# EAGLE board LC_metr_BF245+pnp (EAGLE 6.0)
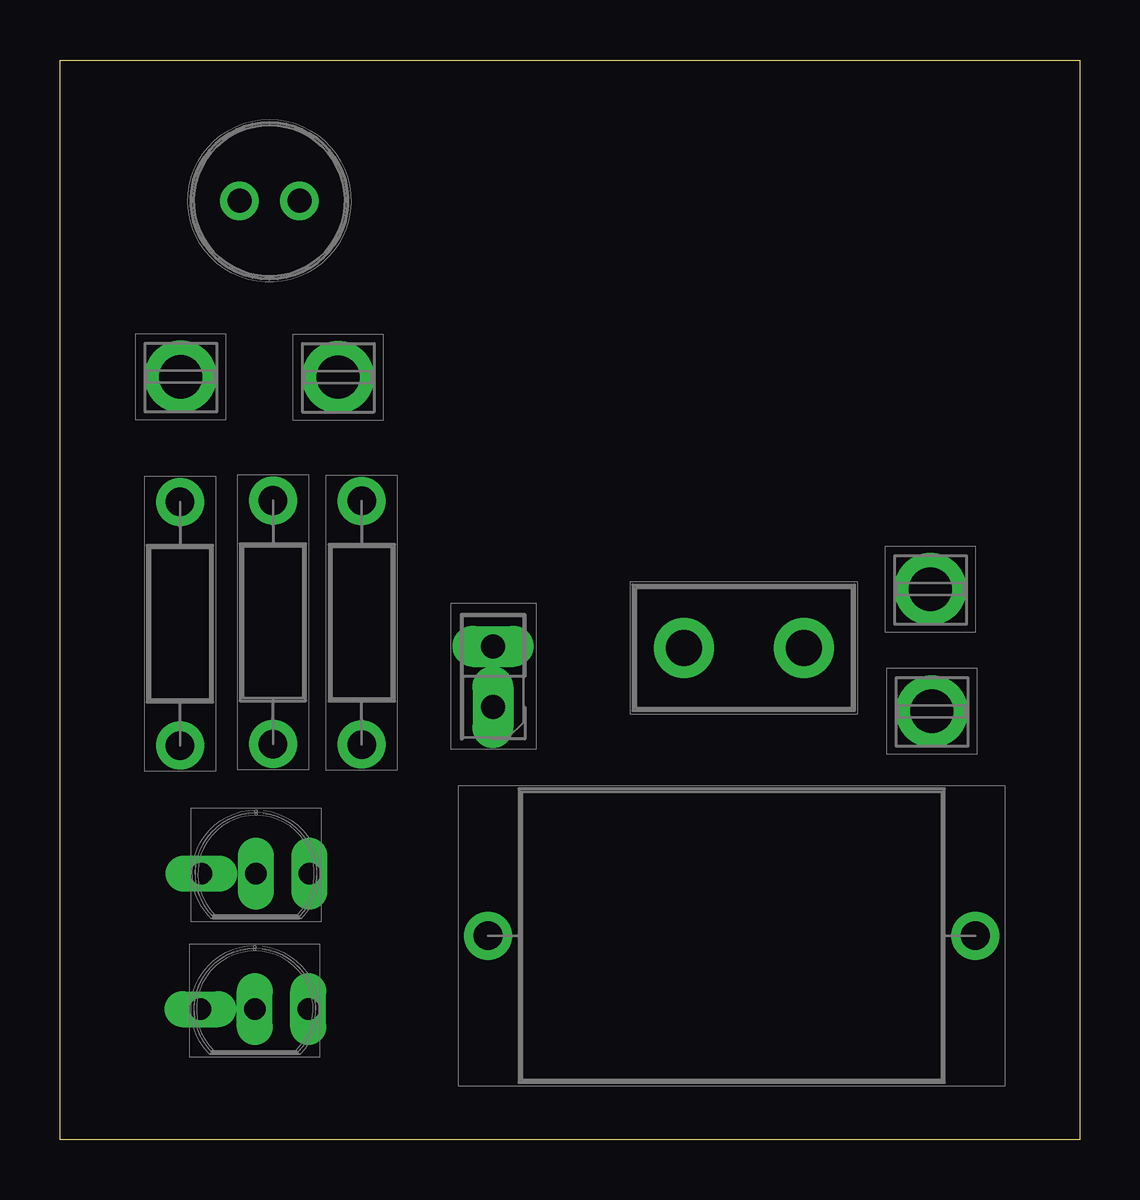
[diagram p0: board, top side]
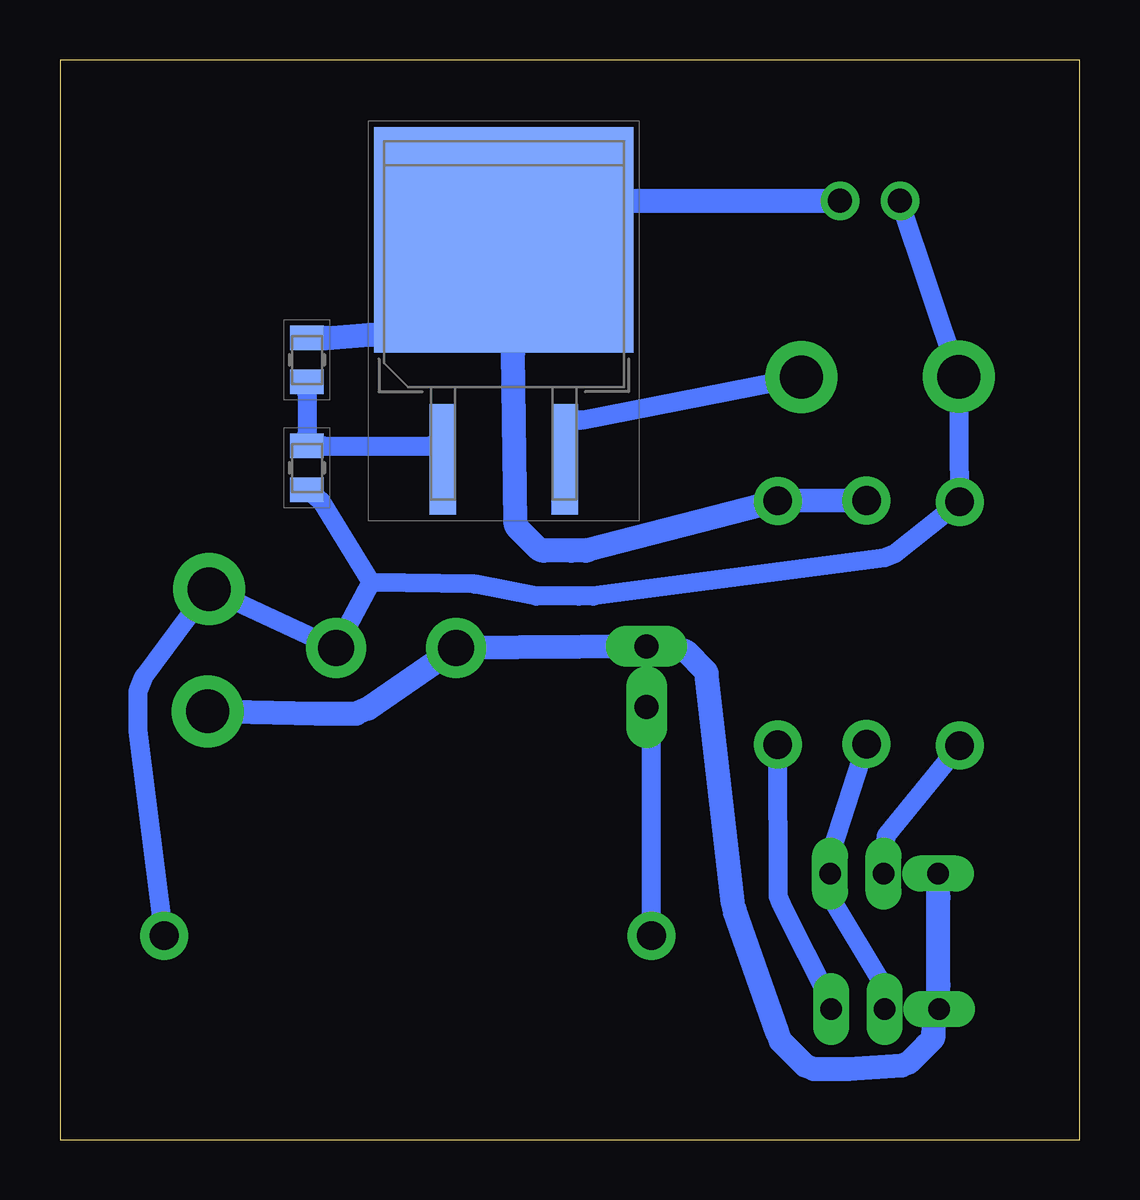
[diagram p1: board, bottom side, seen from below]

Size 42.5 x 45 mm. Coordinates in mm from the lower left corner, seen from the top.
Outline: 42.5,0 0,0 0,45 42.5,45 42.5,0
Copper layers 1+16: F.Cu 0.0035mm / dielectric 0.15mm / B.Cu 0.0035mm
Design rules: minimum track width 0.5mm, track to track 0.5mm, copper to edge 0.3mm, minimum pad ring 0.1mm, minimum via ring 0.1mm
Net classes: 0 default: width 0.5 mm, clearance 0.5 mm; 1 kicad_default: width 0.8 mm, clearance 0.5 mm to class 0, clearance 0.5 mm

## Footprints (pad centres in the part's own frame; a part is rotated, then mirrored left to right if it is on the bottom)
main:C_Disc_D9.0mm_W5.0mm_P5.00mm = drill 1.5 pad 2.5: 1 0,0; 2 5,0
Capacitor_THT:C_Radial_D6.3mm_H7.0mm_P2.50mm = drill 1 pad 1.6: 1 0,0; 2 2.5,0
main:Pin_3mm_Dril_1mm = drill 1.8 pad 3: 1 0,0
main:PinSocket_2x01_P2.54mm_Vertical = drill 1 pad 1.7 long: 1 0,0; 2 -2.54,0
Inductor_THT:L_Axial_L17.5mm_D12.0mm_P20.32mm_Horizontal_Vishay_IM-10-46 = drill 1.2 pad 2: 1 0,0; 2 20.32,0
main:TO-92_Inline = drill 0.9 pad 1.5 long: 1 -1,0; 2 1.27,0; 3 3.5,0
main:R_Axial_DIN0207_L6.3mm_D2.5mm_P10.16mm_Horizontal::1 = drill 1.2 pad 2: 1 0,0; 2 10.16,0
main:R_Axial_DIN0207_L6.3mm_D2.5mm_P10.16mm_Horizontal = drill 1.2 pad 2: 1 0,0; 2 10.16,0
Resistor_SMD:R_0805_2012Metric = smd 1.027 x 1.402: 1 -0.912,0; 2 0.912,0
Package_TO_SOT_SMD:TO-263-2 = smd 4.602 x 1.102: 1 -7.65,2.54; 3 -7.65,-2.54 | smd 4.552 x 5.252: 2 -0.925,-2.775; 2@1 -0.925,2.775; 2@3 3.925,-2.775; 2@4 3.925,2.775 | smd 9.402 x 10.802: 2@2 1.5,0

## Placement (x,y rotation side)
C1  [main:C_Disc_D9.0mm_W5.0mm_P5.00mm]  26,20.5 0 top
C2  [Capacitor_THT:C_Radial_D6.3mm_H7.0mm_P2.50mm]  9.98,39.13 180 top
J1  [main:Pin_3mm_Dril_1mm]  36.34,17.85 0 top
J2  [main:Pin_3mm_Dril_1mm]  36.28,22.94 0 top
J3  [main:PinSocket_2x01_P2.54mm_Vertical]  18.05,18.02 270 top
J4  [main:Pin_3mm_Dril_1mm]  11.6,31.78 0 top
J5  [main:Pin_3mm_Dril_1mm]  5.03,31.79 0 top
L1  [Inductor_THT:L_Axial_L17.5mm_D12.0mm_P20.32mm_Horizontal_Vishay_IM-10-46]  17.84,8.5 0 top
Q1  [main:TO-92_Inline]  6.85,5.43 0 top
Q2  [main:TO-92_Inline]  6.9,11.09 0 top
R1  [main:R_Axial_DIN0207_L6.3mm_D2.5mm_P10.16mm_Horizontal::1]  12.58,26.62 270 top
R2  [main:R_Axial_DIN0207_L6.3mm_D2.5mm_P10.16mm_Horizontal::1]  8.88,26.64 270 top
R3  [main:R_Axial_DIN0207_L6.3mm_D2.5mm_P10.16mm_Horizontal]  5,16.42 90 top
R4  [Resistor_SMD:R_0805_2012Metric]  32.21,32.5 270 bottom
R5  [Resistor_SMD:R_0805_2012Metric]  32.21,28 270 bottom
U1  [Package_TO_SOT_SMD:TO-263-2]  24,36 90 bottom

## Library data of the parts
C1 C2 J1-J5 L1 Q1 Q2 R1-R5 U1 = TopoR

## Nets
+5V [kicad_default]: C2.1 R1.1 R2.1 R4.1 U1.2 U1.2@1 U1.2@2 U1.2@3 U1.2@4
+12V: J4.1 U1.3
GND: C1.2 C2.2 J2.1 J5.1 L1.2 R3.2 R5.2
Net-(J1-Pin_1) [kicad_default]: C1.1 J1.1 J3.2 Q1.1 Q2.1
Net-(J3-Pin_1): J3.1 L1.1
Net-(Q1-B): Q1.2 Q2.3 R2.2
Net-(Q1-C): Q1.3 R1.2
Net-(Q2-S): Q2.2 R3.1
Net-(U1-ADJ): R4.2 R5.1 U1.1

## Tracks (layer width: path | path; a pad name or v marks a point on that pad's centre or on a via)
+5V
  B.Cu 1: R2.1 R1.1 20.49,24.57 20.59,24.55 21.19,24.55 22.33,24.55 22.43,24.57 22.51,24.6 22.59,24.66 23.4,25.47 23.46,25.55 23.49,25.63 23.51,25.73 23.61,32.8 23.61,33.3 U1.2@2 19.1,39.13 18.6,39.13 C2.1 | R4.1 31.51,33.41 31.38,33.41 29.61,33.55 29.4,33.55 28.9,33.55 U1.2@1
+12V
  B.Cu 0.8: U1.3 21.31,30 20.91,30 20.74,30 J4.1
GND
  B.Cu 0.8: 29.53,23.22 25.2,23.15 22.65,22.65 20.87,22.65 20.27,22.65 8.13,24.24 7.71,24.41 R3.2 J5.1 C2.2 | R5.2 31.62,26.62 31.61,26.61 29.53,23.22 | 29.53,23.22 C1.2 J2.1 38.98,19.32 39.01,19.26 39.23,18.75 39.25,18.68 39.25,17.03 L1.2
Net-(J1-Pin_1)
  B.Cu 1: Q2.1 5.88,10.59 5.88,10.09 5.88,6.43 5.88,5.93 Q1.1 6.1,4.93 6.1,4.43 6.1,4.23 6.39,3.93 7.12,3.21 7.43,3.08 9.63,2.93 11.07,2.93 11.43,3.08 12.45,4.1 12.6,4.46 14.38,9.58 14.45,9.87 15.55,19.45 15.59,19.53 16.39,20.34 16.48,20.37 17.9,20.56 J3.2 18.2,20.56 C1.1 29.62,17.99 29.66,17.97 30.15,17.76 30.19,17.75 31.81,17.75 J1.1
Net-(J3-Pin_1)
  B.Cu 0.8: L1.1 17.84,17.17 17.84,17.57 J3.1
Net-(Q1-B)
  B.Cu 0.8: Q1.2 8.12,5.68 8.2,6.39 8.33,6.71 10.19,9.81 10.32,10.13 10.4,10.84 Q2.3 10.4,11.34 10.32,12.04 R2.2
Net-(Q1-C)
  B.Cu 0.8: Q1.3 10.35,5.68 12.42,9.81 12.55,10.13 R1.2
Net-(Q2-S)
  B.Cu 0.8: Q2.2 8.17,11.34 8.05,12.64 8.03,12.69 R3.1
Net-(U1-ADJ)
  B.Cu 0.8: R4.2 32.21,31.47 32.21,31.07 32.21,29.43 32.21,29.03 R5.1 31.51,28.91 27.09,28.91 26.69,28.91 U1.1